# Altium PCB PCB1.PcbDoc
Units mil, origin at the board's own origin, x right, y up, seen from the top; angles counter-clockwise.
Board outline 3228.35 x 3228.35 mil, 2 copper layers (Top Layer, Bottom Layer); 62 components, 63 nets, 350 pads, 58 vias.
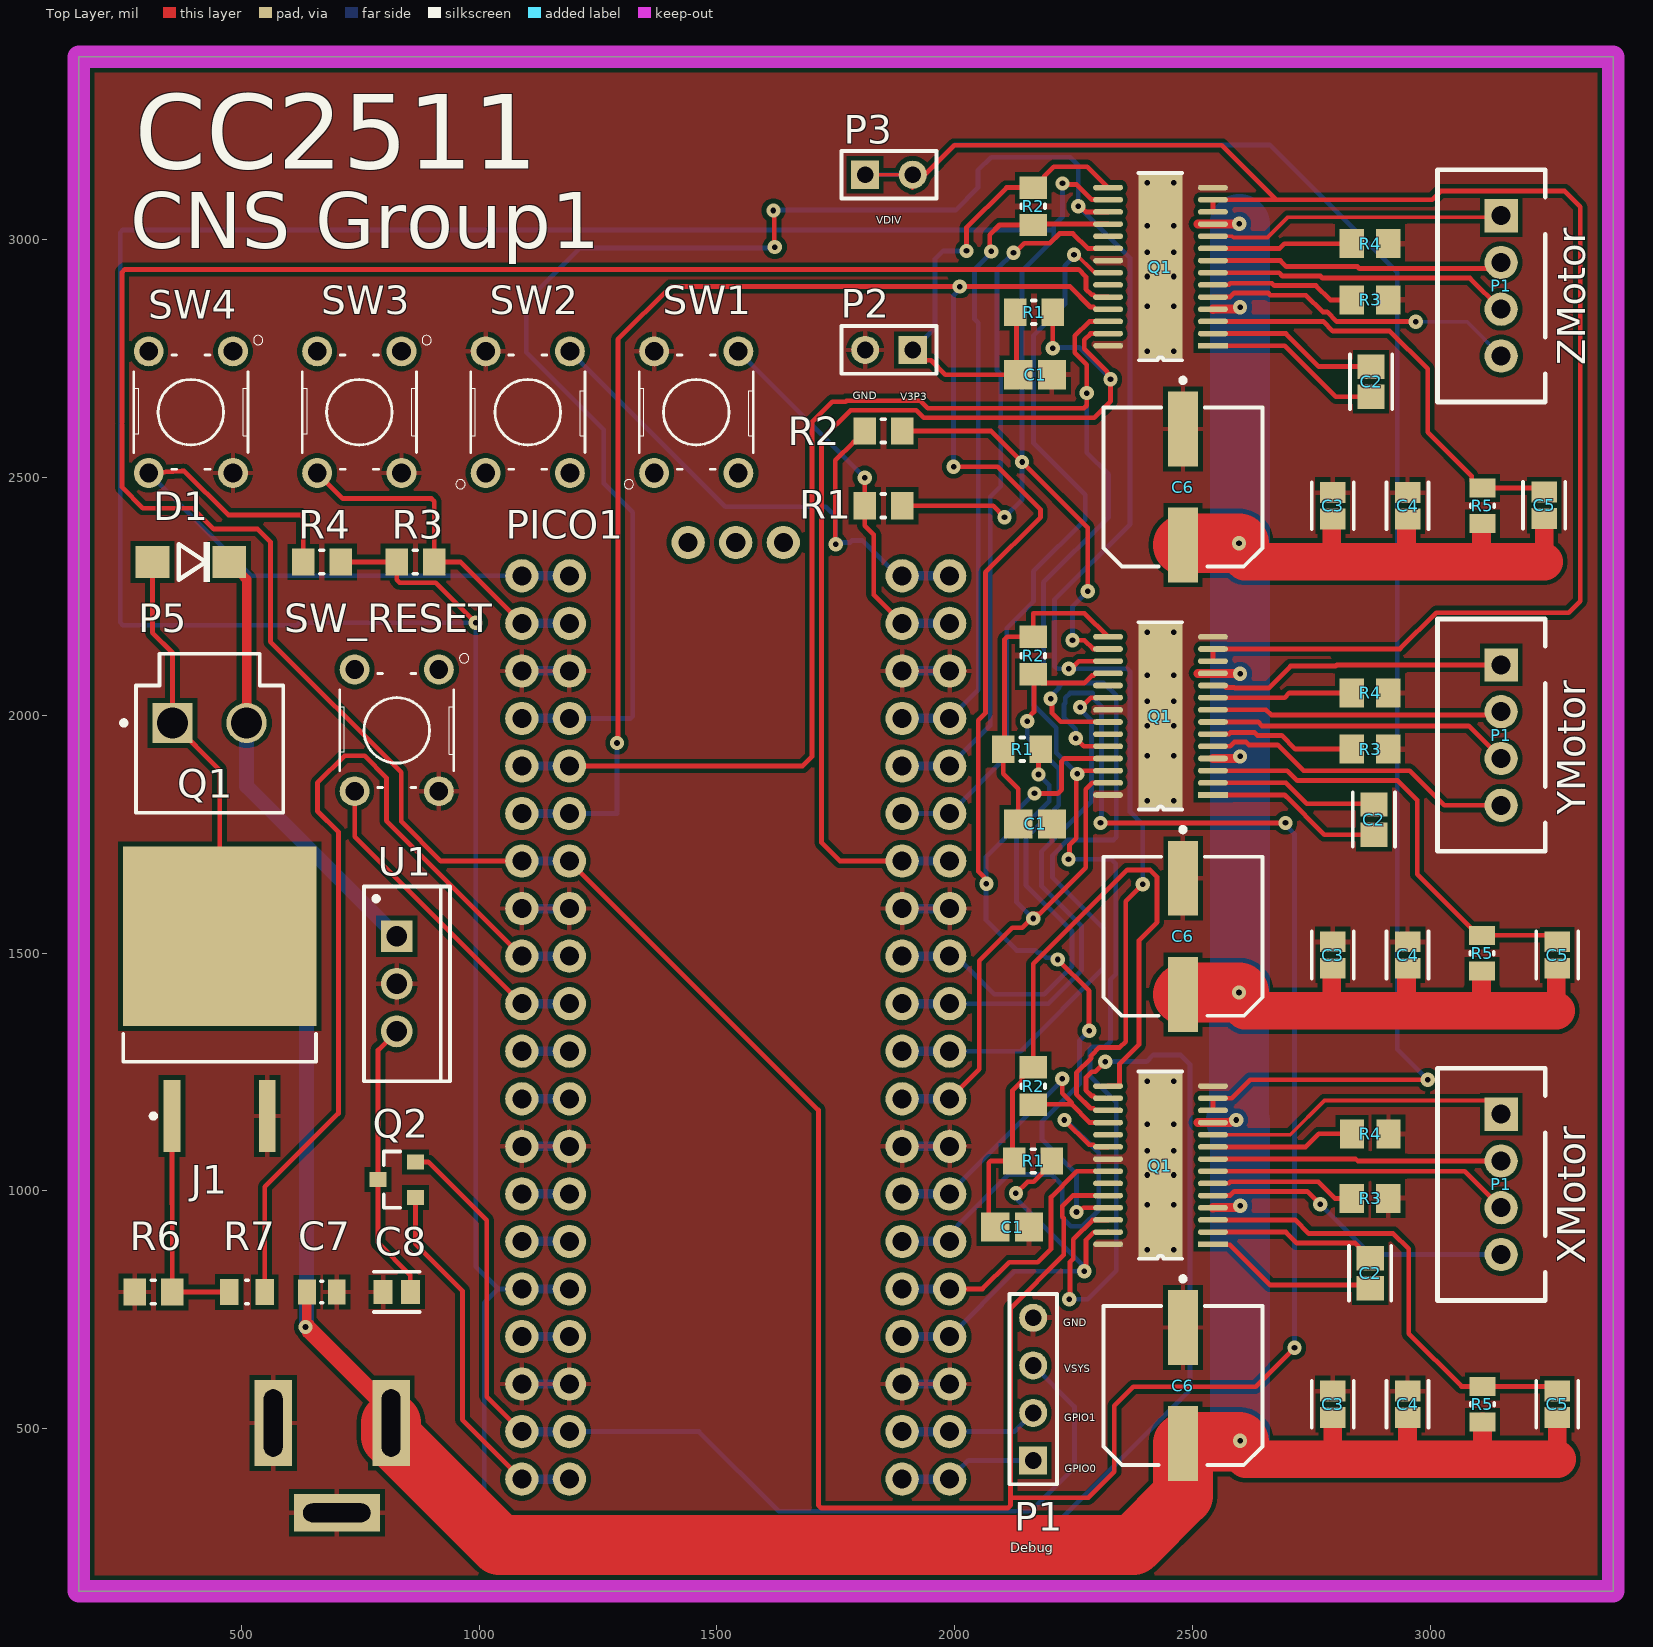
[diagram p0: Top Layer view]
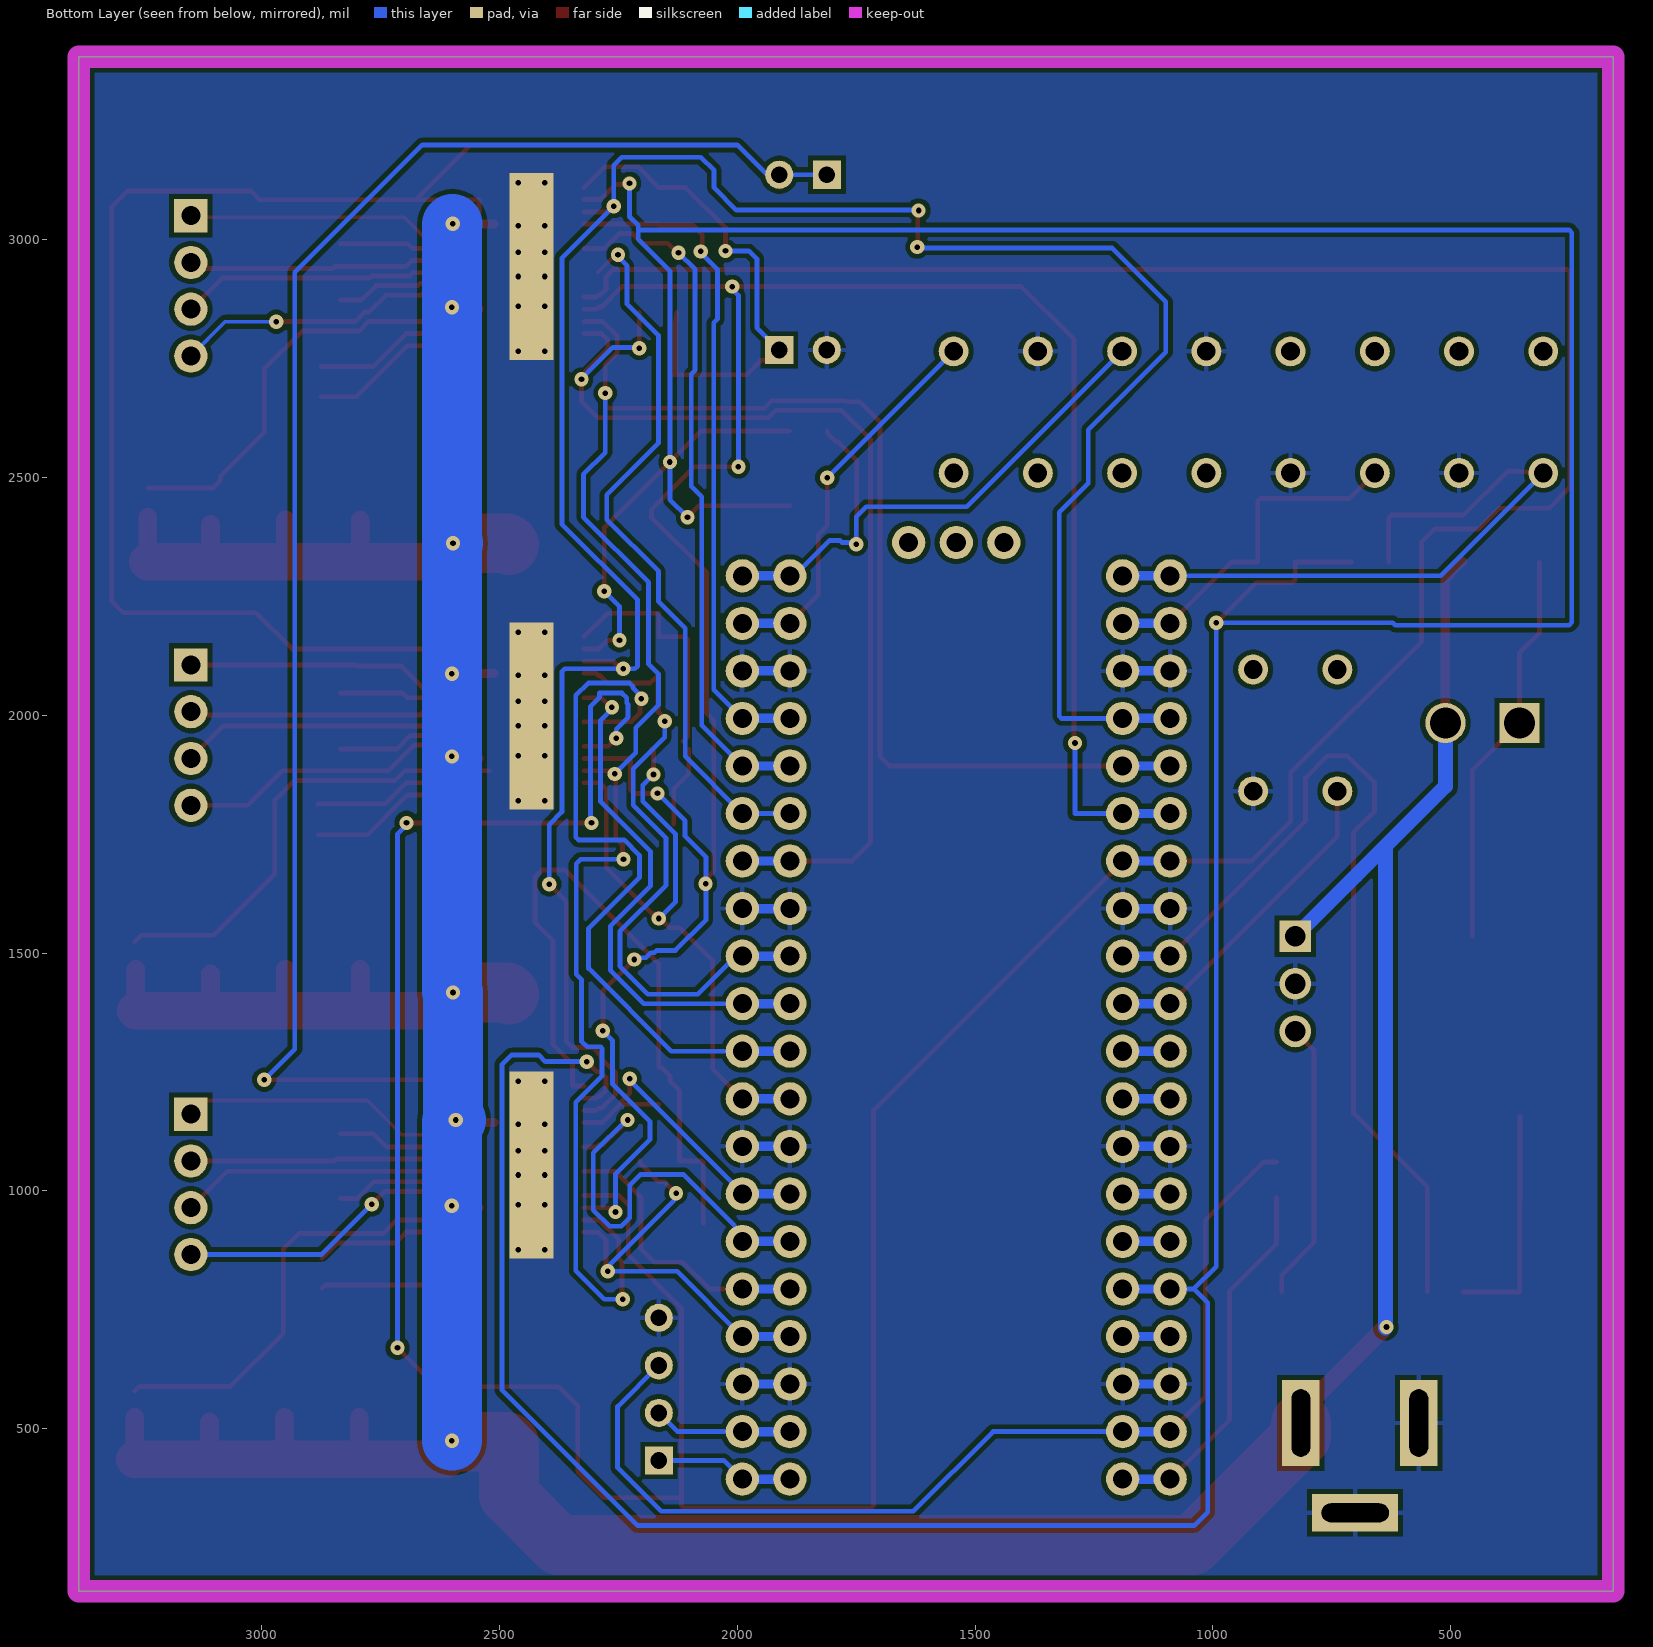
[diagram p1: Bottom Layer view, seen from below]

## Layer stack, top to bottom
Top Solder: solder mask 0.4, Solder Resist, Dk 3.5
Top Layer: signal copper 1.4
Dielectric 1: dielectric 12.6, FR-4, Dk 4.8
Bottom Layer: signal copper 1.4
Bottom Solder: solder mask 0.4, Solder Resist, Dk 3.5

## Board outline
157.48,3385.83 3385.83,3385.83 3385.83,157.48 157.48,157.48

## Design rules (kind name [scope] priority, off if disabled: settings)
Clearance [All] p1: gap=10 ignorepadtopadclearanceinfootprint=FALSE except(0: Arc-Hole Track-Hole SMDPad-Hole THPad-Hole Via-Hole Fill-Hole Poly-Hole Region-Hole Text-Hole)
HoleSize [All] p1: absolutevalues=TRUE maxlimit=150 minlimit=11.81 maxpercent=80.000 minpercent=20.000
MinimumSolderMaskSliver [All] p1: minsoldermaskwidth=1
PolygonConnect "DRV8825 Heatsinking" [HasFootprint('DRV8825 HTSSOP') vs InNet('GND')] p1: connectstyle=Direct reliefconductorwidth=10 reliefentries=4 polygonreliefangle="90 Angle" airgapwidth=10
PolygonConnect [All] p2: connectstyle=Relief reliefconductorwidth=10 reliefentries=4 polygonreliefangle="90 Angle" airgapwidth=10
RoutingVias [All] p1: holewidth=11.81 width=30 viastyle="Through Hole" minholewidth=11.81 minwidth=19.68 maxholewidth=11.81 maxwidth=50
SMDNeckDown [All] p1: percent=200.000
SilkToSilkClearance [All] p1: silktosilkclearance=1
SilkToSolderMaskClearance [IsPad] p1: minsilkscreentomaskgap=1 clearancetoexposedcopper=TRUE
SolderMaskExpansion [All] p1: expansion=4 istentingtop=FALSE
Width Width_1 [InNet('VM')] p1: maxlimit=157.48 minlimit=8 preferedwidth=157.48 minimp=50.000000 maximp=50.000000 favimp=50.000000
Width [All] p2: maxlimit=25 minlimit=8 preferedwidth=10 toplayer_maxwidth=10 minimp=50.000000 maximp=50.000000 favimp=50.000000
26 further rules are at their usual default settings.

## Classes and differential pairs
channel class "DRV8825 stepper motor controller": XStepper YStepper ZStepper
component class ZStepper: C2 C3 C4 C5 C6 R5
component class Spindle: D1 P5 Q1 R6 R7
component class Power: C7 C8 J1 U1
component class Main: P1 P2 P3 PICO1 Q2 R1 R2 R3 R4 SW1 SW2 SW3 SW4 SW_RESET

## Components (designator, comment, footprint, x,y, rotation, side; value= is the part's Value field where it differs from the comment)
C1 "0.47uF" CAPC2013X140X50ML20T25 2169.29,2716.53 r0 top
C1 "0.47uF" CAPC2013X140X50ML20T25 2169.29,1771.65 r0 top
C1 "0.47uF" CAPC2013X140X50ML20T25 2121,924 r0 top
C2 "0.01uF" FP-0805-L_2_01_0_2-W_1_25-IPC_B 2876,2702 r270 top
C2 "0.01uF" FP-0805-L_2_01_0_2-W_1_25-IPC_B 2882,1781 r270 top
C2 "0.01uF" FP-0805-L_2_01_0_2-W_1_25-IPC_B 2874.01,826.77 r270 top
C3 "0.1uF" FP-0805-L_2_01_0_2-W_1_25-IPC_C 2795.28,2440.94 r90 top
C3 "0.1uF" FP-0805-L_2_01_0_2-W_1_25-IPC_C 2795.28,1496.06 r90 top
C3 "0.1uF" FP-0805-L_2_01_0_2-W_1_25-IPC_C 2795.28,551.18 r90 top
C4 "0.1uF" FP-0805-L_2_01_0_2-W_1_25-IPC_C 2952.76,2440.94 r90 top
C4 "0.1uF" FP-0805-L_2_01_0_2-W_1_25-IPC_C 2952.76,1496.06 r90 top
C4 "0.1uF" FP-0805-L_2_01_0_2-W_1_25-IPC_C 2952.76,551.18 r90 top
C5 "0.1uF" FP-0805-L_2_01_0_2-W_1_25-IPC_C 3240,2442 r90 top
C5 "0.1uF" FP-0805-L_2_01_0_2-W_1_25-IPC_C 3267.72,1496.06 r90 top
C5 "0.1uF" FP-0805-L_2_01_0_2-W_1_25-IPC_C 3267.72,551.18 r90 top
C6 "100uF" FP-FKE-MFG 2480.32,2480.32 r270 top
C6 "100uF" FP-FKE-MFG 2480.31,1535.43 r270 top
C6 "100uF" FP-FKE-MFG 2480.31,590.55 r270 top
C7 "33uF" CAPC0805(2012)100_L 669.29,787.4 r180 top value=330nF
C8 "0.1uF" FP-0805B-IPC_C 826.77,787.4 r180 top
D1 "" SS34-1 393.7,2322.83 r180 top
J1 "Barrel Jack 5.5x2.1mm" "Barrel Jack 2.1x5.5mm THT" 275.59,511.81 r270 top
P1 "Header 4" HDR1X4 2165.35,433.07 r90 top
P1 "Header to stepper motor" "B4B-XH-A (LF)(SN)" 3149.6,3051.18 r270 top
P1 "Header to stepper motor" "B4B-XH-A (LF)(SN)" 3149.6,2106.3 r270 top
P1 "Header to stepper motor" "B4B-XH-A (LF)(SN)" 3149.6,1161.42 r270 top
P2 "Header 2" HDR1X2 1912.02,2768.83 r180 top
P3 "Header 2" HDR1X2 1812.03,3137.24 r0 top
P5 "2 Port Header" JST-B2P-VH(LF)(SN)_V 433.07,1929.13 r0 top
PICO1 "Raspberry Pi Pico R3" RASPI_PICO_83 1939.76,348.7 r90 top
Q1 "BUK9635-55A,118" NXP-SOT404_L 454.33,1401.58 r90 top
Q1 "DRV8825" "DRV8825 HTSSOP" 2543.31,2777.56 r180 top
Q1 "DRV8825" "DRV8825 HTSSOP" 2543.3,1832.67 r180 top
Q1 "DRV8825" "DRV8825 HTSSOP" 2543.31,887.79 r180 top
Q2 "DMG2307L-7" FP-SOT23-MFG 826.77,1023.62 r180 top
R1 "10k" RESC2013X60X35ML10T20 1850.39,2440.94 r180 top
R1 "10k" RESC2013X60X35ML10T20 2167,2848 r180 top
R1 "10k" RESC2013X60X35ML10T20 2142,1929 r180 top
R1 "10k" RESC2013X60X35ML10T20 2165.35,1062.99 r180 top
R2 "10k" RESC2013X60X35ML10T20 1850.4,2598.42 r180 top
R2 "10k" RESC2013X60X35ML10T20 2165.35,3070.87 r270 top
R2 "10k" RESC2013X60X35ML10T20 2165.35,2125.98 r270 top
R2 "10k" RESC2013X60X35ML10T20 2165.35,1220.47 r270 top
R3 "0.47" RESC2013X65X40ML15T20 2874.01,984.25 r0 top
R3 "10k" RESC2013X60X35ML10T20 866.14,2322.83 r0 top
R3 "0.47" RESC2013X65X40ML15T20 2874.01,2874.01 r0 top
R3 "0.47" RESC2013X65X40ML15T20 2874.01,1929.13 r0 top
R4 "10k" RESC2013X60X35ML10T20 669.29,2322.84 r180 top
R4 "0.47" RESC2013X65X40ML15T20 2874.01,2992.12 r0 top
R4 "0.47" RESC2013X65X40ML15T20 2874.01,2047.24 r0 top
R4 "0.47" RESC2013X65X40ML15T20 2874.37,1120 r0 top
R5 "1M" FP-CRCW0805-e3-IPC_B 3110.24,2440.94 r90 top
R5 "1M" FP-CRCW0805-e3-IPC_B 3109.37,1500 r90 top
R5 "1M" FP-CRCW0805-e3-IPC_B 3110.24,551.18 r90 top
R6 "10k" RESC2013X60X35ML10T20 314.96,787.4 r0 top
R7 "10" FP-CRCW0805-e3-IPC_B 511.81,787.4 r180 top
SW1 "B3F-1000" SW_B3F-1000 1456.69,2637.8 r90 top
SW2 "B3F-1000" SW_B3F-1000 1102.36,2637.8 r90 top
SW3 "B3F-1000" SW_B3F-1000 748.03,2637.8 r270 top
SW4 "B3F-1000" SW_B3F-1000 393.7,2637.8 r270 top
SW_RESET "B3F-1000" SW_B3F-1000 826.77,1968.5 r270 top
U1 "5V Regulator" TO220 826.77,1435.44 r270 top

## Footprints (in the part's own frame and the unit in brackets; to place one, negate y for a bottom-side part, rotate by r counter-clockwise, add the part's x,y. Pads: shape width x height; smd on the part's side, far side on the other; paste and mask are expansions set on the pad)
"B4B-XH-A (LF)(SN)" [mil] "B4B-XH-A (LF)(SN) Wire-To-Board Connector, Vertical, 2.5 mm, 4 Contacts"
  rect 70x70 hole 40: 1(0,0)
  round 70 hole 40: 2(98.42,0) 3(196.85,0) 4(295.28,0)
  silkscreen extent -96,-134 392,93, body extent -97,-134 391,92, height 276
"Barrel Jack 2.1x5.5mm THT" [mm] "GCT DCJ200-10-A-K1-K"
  rect 4.6x2 hole 1 slot 3.6 at 0 deg: 1(0,13.7) 2(0,7.4)
  rect 2x4.6 hole 1 slot 3.6 at 90 deg: 2(4.8,10.8)
  body extent -4.47,0 5.07,14.3, height 11
CAPC0805(2012)100_L [mm] "Chip Capacitor, Body 2.0x1.2mm, Height 1.0mm, IPC High Density"
  rect 0.95x1.35 smd: 1(-0.8,0) 2(0.8,0)
  silkscreen extent -0.05,-0.58 0.05,0.57, body extent -1.1,-0.72 1.1,0.72, height 1
CAPC2013X140X50ML20T25 [mm] "Chip Capacitor, 2-Leads, Body 2.00x1.25mm, IPC Low Density"
  rect 1.5x1.55 smd: 1(-0.9,0) 2(0.9,0)
  body extent -1.1,-0.72 1.1,0.72, height 1.4
"DRV8825 HTSSOP" [mm]
  rect 1.6x0.3 smd paste+0 mask+0.07: 1(0,0)
  oval 1.6x0.3 smd paste+0 mask+0.07: 2(0,-0.65) 3(0,-1.3) 4(0,-1.95) 5(0,-2.6) 6(0,-3.25) 7(0,-3.9) 8(0,-4.55) 9(0,-5.2) 10(0,-5.85) 11(0,-6.5) 12(0,-7.15) 13(0,-7.8) 14(0,-8.45) 15(5.6,-8.45) 16(5.6,-7.8) 17(5.6,-7.15) 18(5.6,-6.5) 19(5.6,-5.85) 20(5.6,-5.2) 21(5.6,-4.55) 22(5.6,-3.9) 23(5.6,-3.25) 24(5.6,-2.6) 25(5.6,-1.95) 26(5.6,-1.3) 27(5.6,-0.65) 28(5.6,0)
  round 0.6 hole 0.3: PPAD(2.1,0.3) PPAD(2.1,-3.7) PPAD(2.1,-2.1) PPAD(2.1,-6.4) PPAD(2.1,-5) PPAD(2.1,-8.7) PPAD(3.5,-2.1) PPAD(3.5,0.3) PPAD(3.5,-8.7) PPAD(3.5,-6.4) PPAD(3.5,-5) PPAD(3.5,-3.7)
  rect 2.34x10 smd paste-100 mask-100: PPAD(2.8,-4.225)
  rect 2.34x5.18 smd paste+0: PPAD(2.8,-4.225)
  rect 2.34x10 smd far side paste-100 mask-100: PPAD(2.8,-4.225)
  silkscreen extent 1.63,-9.23 3.97,0.77, body extent -0.65,-9.34 6.25,0.87, height 1.11
FP-0805-L_2_01_0_2-W_1_25-IPC_B [mil]
  rect 51.36x57.33 smd paste+0 mask+0: 1(-31.72,0) 2(31.72,0)
  silkscreen extent -57,-44 57,44, body extent -67,-39 67,39, height 10
FP-0805-L_2_01_0_2-W_1_25-IPC_C [mil]
  rect 43.49x53.39 smd paste+0 mask+0: 1(-27.79,0) 2(27.79,0)
  silkscreen extent -50,-44 50,44, body extent -53,-32 53,32, height 10
FP-0805B-IPC_C [mil]
  rect 39.61x49.69 smd paste+0 mask+0: 1(-28.59,0) 2(28.59,0)
  silkscreen extent -48,-42 48,42, body extent -52,-31 52,31, height 10
FP-CRCW0805-e3-IPC_B [mil]
  rect 39.63x55.44 smd paste+0 mask+0: 1(-37.43,0) 2(37.44,0)
  silkscreen extent -3,-25 3,25, body extent -67,-38 67,38, height 10
FP-FKE-MFG [mm]
  rect 4x1.6 smd paste+0 mask+0: 1(-3.1,0) 2(3.1,0)
  silkscreen extent -5.82,-4.25 4.25,4.25, body extent -5.35,-4.5 5.35,4.5, height 0.25
FP-SOT23-MFG [mm]
  rect 0.9x0.8 smd paste+0 mask+0: 1(-1,0.95) 2(-1,-0.95) 3(1,0)
  silkscreen extent -0.18,-1.5 0.7,1.5, body extent -1.55,-1.6 1.55,1.6, height 0.25
HDR1X2 [mm] "Connector; Header; 2 Position"
  rect 1.5x1.5 hole 0.9: 1(0,0)
  round 1.5 hole 0.9: 2(2.54,0)
  silkscreen extent -1.27,-1.27 3.81,1.27
HDR1X4 [mm] "Connector; Header; 4 Position"
  rect 1.5x1.5 hole 0.9: 1(0,0)
  round 1.5 hole 0.9: 2(2.54,0) 3(5.08,0) 4(7.62,0)
  silkscreen extent -1.27,-1.27 8.89,1.27
JST-B2P-VH(LF)(SN)_V [mm] "THD, 2-Leads, Body 8.5x7.86mm, Pitch 3.96mm"
  rect 2.15x2.15 hole 1.65: 1(-1.98,1.4)
  round 2.15 hole 1.65: 2(1.98,1.4)
  silkscreen extent -4.7,-3.4 3.93,5.1, body extent -3.93,-3.2 3.93,5.3, height 10.9
NXP-SOT404_L [mm] "DPAK, 3-Leads, Body 10.3x9.8mm, Pitch 2.54mm, IPC High Density"
  rect 3.85x0.9 smd: 1(-6.2,2.54) 3(-6.2,-2.54)
  rect 9.6x10.35 smd: 2(3.4,0)
  silkscreen extent -6.32,-5.15 -1.8,5.15, body extent -3.3,-5.15 6.5,5.15, height 4.5
RASPI_PICO_83 [mil] "Raspberry Pi Pico 40-pin +40 breakouts + 3 debug"
  round 70 hole 40: 1(45,-50) 1(45,50) 2(145,-50) 2(145,50) 3(245,-50) 3(245,50) 4(345,-50) 4(345,50) 5(445,-50) 5(445,50) 6(545,-50) 6(545,50) 7(645,-50) 7(645,50) 8(745,-50) 8(745,50) 9(845,-50) 9(845,50) 10(945,-50) 10(945,50) 11(1045,-50) 11(1045,50) 12(1145,-50) 12(1145,50) 13(1245,-50) 13(1245,50) 14(1345,-50) 14(1345,50) 15(1445,-50) 15(1445,50) 16(1545,-50) 16(1545,50) 17(1645,-50) 17(1645,50) 18(1745,-50) 18(1745,50) 19(1845,-50) 19(1845,50) 20(1945,-50) 20(1945,50) 21(1945,750) 21(1945,850) 22(1845,750) 22(1845,850) 23(1745,750) 23(1745,850) 24(1645,750) 24(1645,850) 25(1545,750) 25(1545,850) 26(1445,750) 26(1445,850) 27(1345,750) 27(1345,850) 28(1245,750) 28(1245,850) 29(1145,750) 29(1145,850) 30(1045,750) 30(1045,850) 31(945,750) 31(945,850) 32(845,750) 32(845,850) 33(745,750) 33(745,850) 34(645,750) 34(645,850) 35(545,750) 35(545,850) 36(445,750) 36(445,850) 37(345,750) 37(345,850) 38(245,750) 38(245,850) 39(145,750) 39(145,850) 40(45,850) 40(45,750) 41(2015,300) 42(2015,400) 43(2015,500)
  Bottom Layer lines w10: 1445,50 1445,36.96 1445,-50
  Bottom Layer lines w19.68: 45,850 45,760 ; 145,850 145,750 ; 245,850 245,750 ; 345,850 345,750 ; 445,850 445,822.06 445,750 ; 545,850 545,760 ; 645,850 645,760 ; 745,850 745,750 ; 845,850 845,750 ; 945,850 945,750 ; 1045,850 1045,750 ; 1145,850 1145,750 ; 1245,850 1245,750 ; 1345,850 1345,750 ; 1445,850 1445,833.75 1445,750 ; 1545,850 1545,826.33 1545,750 ; 1645,850 1645,750 ; 1745,850 1745,750 ; 1845,850 1845,750 ; 1945,850 1945,750 ; 45,50 45,-50 ; 145,50 145,-35 ; 245,50 245,-50 ; 345,50 345,-50 ; 445,50 445,-50 ; 545,50 545,-50 ; 645,50 645,-50 ; 845,50 845,-40 ; 945,50 945,36.96 945,-50 ; 1045,50 1045,-50 ; 1145,50 1145,22.06 1145,-50 ; 1245,50 1245,-50 ; 1345,50 1345,-50 ; 1545,50 1545,-50 ; 1645,50 1645,32.84 1645,-50 ; 1745,50 1745,-50 ; 1845,50 1845,-50 ; 1945,50 1945,-50 ; 745,40 745,-50
  body extent -64,-100 2065,900, height 720
RESC2013X60X35ML10T20 [mm] "Chip Resistor, 2-Leads, Body 2.1x1.35mm, IPC Low Density"
  rect 1.2x1.45 smd: 1(-1,0) 2(1,0)
  silkscreen extent -0.1,-0.63 0.1,0.62, body extent -1.05,-0.68 1.05,0.67, height 0.6
RESC2013X65X40ML15T20 [mm] "Chip Resistor, 2-Leads, Body 2.00x1.30mm, IPC Low Density"
  rect 1.3x1.55 smd: 1(-0.975,0) 2(0.975,0)
  body extent -1.07,-0.72 1.08,0.72, height 0.65
SS34-1 [mm]
  rect 1.8x1.7 smd: A(2.05,0) C(-2.05,0)
  silkscreen extent -1,-1.05 0.65,1.05
SW_B3F-1000 [mm]
  round 1.6 hole 1: 1(-3.25,2.25) 2(3.25,2.25) 3(-3.25,-2.25) 4(3.25,-2.25)
  silkscreen extent -4.1,-3.05 3.05,3.85
TO220 [mm] "TO, Thru-Hole, Vertical, Heatsink Mounted; 3 In-Line Leads; Pitch 2.54 mm"
  rect 1.7x1.7 hole 1.1: 1(-2.54,0)
  round 1.7 hole 1.1: 2(0,0) 3(2.54,0)
  silkscreen extent -5.2,-1.75 5.2,2.85, body extent -5.25,-1.8 5.25,2.9, height 19.7

## Part data
C1 C1 C1: library part CMP-2007-03309-1, Manufacturer=Kemet, Part Number=C0805F474K3RACTU
C2 C2 C2: library part CMP-2007-04361-2, "General Purpose Ceramic Capacitor, 0805, 10nF, 5%, X7R, 0.15, 50V", Capacitance=10nF, Case Code (Imperial)=0805, Case Code (Metric)=2012, Dielectric=X7R, Dielectric Material=Ceramic, Insulation Resistance=100GR, Max Operating Temperature=125°C, Min Operating Temperature=-55°C, Package Quantity=1, Tolerance=5%, Voltage=50V, Case/Package=0805, Construction=Flat, Contact Plating=Tin, Depth=1.25mm, Dissipation Factor=2.5%, Height=0.71mm, Lead Free="Lead Free", Length=2.01mm, Mount="Surface Mount", Number of Pins=2, Packaging="Tape and Reel", Radiation Hardening=No, REACH SVHC="No SVHC", RoHS Compliant=Yes, Series=-, Termination=SMD/SMT, Thickness=0.037inch, Voltage Rating=50V, Voltage Rating (DC)=50V, Width=0.049inch
C3 C3 C3 C4 C4 C4 C5 C5 C5: library part CMP-2000-05016-2, "General Purpose Ceramic Capacitor, 0805, 100nF, 10%, X7R, 0.15, 50V", Capacitance=100nF, Case Code (Imperial)=0805, Case Code (Metric)=2012, Dielectric=X7R, Dielectric Material=Ceramic, Insulation Resistance=100GR, Max Operating Temperature=125°C, Min Operating Temperature=-55°C, Package Quantity=4000, Tolerance=10%, Voltage=50V, Case/Package=0805, Depth=1.25mm, Dissipation Factor=2.5%, Height=0.5mm, Lead Free="Lead Free", Length=2mm, Mount="Surface Mount", Number of Pins=2, Packaging="Cut Tape", Radiation Hardening=No, REACH SVHC="No SVHC", RoHS Compliant=Yes, Series="MLCC X7R", Termination=Standard, Thickness=0.037inch, Voltage Rating=50V, Voltage Rating (DC)=50V, Weight=0.001411oz, Width=1.2mm
C6 C6 C6: library part CMP-2000-06205-2, "CAP ALUM 100UF 20% 25V SMD", Case/Package=Radial, Dielectric Material=Aluminium, ESR (Equivalent Series Resistance)=260mR, Leakage Current=3uA, Max Operating Temperature=105°C, Min Operating Temperature=-55°C, Package Quantity=1, Ripple Current=300mA, Tolerance=20%, Voltage=25V, Capacitance=100uF, Construction=Cylindrical, Diameter=8mm, Height=6.2mm, Height - Seated (Max)=0.244inch, Impedance=260mR, Lead Free="Lead Free", Length=6.2mm, Life (Hours)=2000Hour, Mount="Surface Mount", Number of Pins=2, Packaging="Tape and Reel", Radiation Hardening=No, REACH SVHC="No SVHC", Ripple Current (AC)=300mA, RoHS Compliant=Yes, Series=FK, Termination=SMD/SMT, Voltage Rating=25V, Voltage Rating (DC)=25V, Width=8.3mm
C7: library part CMP-1036-04603-1, "CAP 330nF 25V -20% to +80% 0805 (2012 Metric) Thickness 1mm SMD", Case-EIA=0805, Case-Metric=2012, Rated Voltage="25 V", Tolerance="-20% to +80%", Max Thickness="1 mm", Technology=SMT
C8: library part CMP-45632-000003-1, "CAP CER 0.1UF 50V X7R 0805", Capacitance=100nF, Case Code (Imperial)=0805, Case Code (Metric)=2012, Dielectric=X7R, Max Operating Temperature=125°C, Min Operating Temperature=-55°C, Tolerance=10%, Voltage=50V, Case/Package=0805, Depth=1.25mm, Lead Free="Lead Free", Length=2mm, Packaging="Tape and Reel", Radiation Hardening=No, RoHS Compliant=Yes, Voltage Rating=50V, Voltage Rating (DC)=50V
D1: library part SS34-A, "34 Position Cable Assembly Rectangular Socket to Cable 3.00' (914.40mm)", Package="DO-214 Multicomp", Availability=Unavailable, Check_prices=https://www.snapeda.com/parts/SS34A/TE%20Connectivity%20AMP%20Connectors/view-part/585916/?ref=eda, MF="TE Connectivity", MP=SS34A, Price=None, SnapEDA_Link=https://www.snapeda.com/parts/SS34A/TE%20Connectivity%20AMP%20Connectors/view-part/585916/?ref=snap
J1: library part CMP-005-0005-1, "GCT DCJ200-10-A-K1-K", Component Type=Standard, Design Item ID="Barrel Jack 5.5x2.1mm", Pins=2, Source=JCULibrary.SchLib
P1: "Header, 4-Pin", LatestRevisionDate=17-Jul-2002, LatestRevisionNote="Re-released for DXP Platform.", Publisher="Altium Limited"
P1 P1 P1: library part "B4B-XH-A (LF)(SN) Wire-to-board connector", "Wire-to-board connector, vertical, 2.5mm, 4 contacts"
P2 P3: "Header, 2-Pin", LatestRevisionDate=17-Jul-2002, LatestRevisionNote="Re-released for DXP Platform.", Publisher="Altium Limited"
P5: library part JST_B2P-VH(LF)(SN), "Male Header, Pitch 3.96 mm, 1 x 2 Position, Height 10.9 mm, Tail Length 3.7 mm, -25 to 85 degC, RoHS, Bulk", Capacitance="27 pF", Case Code (Imperial)=0603, Case Code (Metric)=1608, Max Operating Temperature=125degC, Min Operating Temperature=-55degC, Package Quantity=4000, Resistance="100000000000 Ohm", Tolerance=5%, Type (Capacitors)=C0G, Voltage Rating="50 V", Case/Package=0603, ComponentLink1Description="Manufacturer URL", ComponentLink1URL=http://www.jst.com/home2.html, ComponentLink2Description=Datasheet, ComponentLink2URL=http://www.jst-mfg.com/product/pdf/eng/eVH.pdf, DatasheetVersion=May-16, Height="0.8 mm", Length="1.6 mm", Mount="Surface Mount", PackageDescription="Male Header, Pitch 3.96 mm, 1 x 2 Position, Height 10.9 mm, Tail Length 3.7 mm", PackageReference=B2P-VH(LF)(SN), Packaging="Tape and Reel", Pins=2, Radiation Hardening=No, REACH SVHC="No SVHC", RoHSCompliant=True, Voltage Rating (DC)="50 V", Width="0.8 mm"
PICO1: library part "Rapberry Pi Pico-R3"
Q1: "3G PENTABAND 824-2170MHZ STRAIGH", Manufacturer=Nexperia, Manufacturer Part Number="N-Type MOSFET", Supplier Part Number 1=1727-7196-1-ND, Category=MOSFETs, Pricing 1="1=1.16000, 10=1.03500, 100=0.80710 (USD)", RoHS=Yes, RoHS Compliant=Yes, Stock 1=28, Supplier 1=Digi-Key
Q1 Q1 Q1: library part "Stepper motor driver DRV8825", "TI DRV8825 Stepper Motor Controller IC"
Q2: library part CMP-12801-000080-1, "MOSFET P-CH 30V 2.5A SOT-23", Case/Package=SOT-23, Continuous Drain Current (ID)=3.8A, Drain to Source Resistance=90mR, Drain to Source Voltage (Vdss)=30V, Gate to Source Voltage (Vgs)=20V, Input Capacitance=371.3pF, Max Operating Temperature=150°C, Max Power Dissipation=760mW, Min Operating Temperature=-55°C, Package Quantity=3000, Power Dissipation=1.36W, Element Configuration=Single, Fall Time=13.4ns, Height=1mm, Lead Free="Lead Free", Length=3mm, Mount="Surface Mount", Number of Channels=1, Number of Elements=1, Number of Pins=3, Packaging="Tape and Reel", Radiation Hardening=No, Rds On Max=90mR, REACH SVHC="No SVHC", Rise Time=7.3ns, Turn-Off Delay Time=22.4ns, Turn-On Delay Time=4.8ns, Weight=0.000282oz, Width=1.4mm
R1 R1 R1 R1 R2 R2 R2 R2 R3 R4 R6: library part CMP-2000-05025-1, "Chip Resistor, 10 KOhm, +/- 5%, 0.125 W, -55 to 155 degC, 0805 (2012 Metric), RoHS, Tape and Reel", Manufacturer=Yageo, Package Description="2-Pin Surface Mounted Device, Body 2 x 1.25 mm", Package Reference=805, Power Rating=250mW, Resistance=10kohm, Resistance Tolerance=±5%, Resistor Case Style=0805[2012Metric], Resistor Element Type=ThickFilm, Temperature Coefficient=±100ppm/degC, Voltage Rating=150V, Automotive Qualification Standard=-, Datasheet URL=http://www.yageo.ru/pdf/RC0805.pdf, Datasheet Version="REV. 2, 09/2004", Manufacturer URL=http://www.yageo.com/, MSL=MSL1-Unlimited, Packaging=CutTape, Product Range=RCSeries, SVHC=ToBeAdvised
R3 R3 R3 R4 R4 R4: library part CMP-2001-04359-1, Manufacturer="Vishay Dale", Part Number=RCWE0805R470FKEA
R5 R5 R5: library part CMP-2001-03630-2, "RES Thick Film, 1MΩ, 1%, 0.125W, 100ppm/°C, 0805", Case Code (Imperial)=0805, Case Code (Metric)=2012, Max Operating Temperature=155°C, Min Operating Temperature=-55°C, Package Quantity=5000, Power Rating=125mW, Resistance=1MR, Temperature Coefficient=100ppm/°C, Tolerance=1%, Voltage Rating=150V, Case/Package=0805, Composition="Thick Film", Contact Plating=Tin, Depth=1.25mm, Height=0.45mm, Lead Free="Lead Free", Length=2mm, Military Standard=Not, Mount="Surface Mount", Number of Pins=2, Packaging="Tape and Reel", Radiation Hardening=No, Termination=SMD/SMT, Voltage Rating (DC)=150V, Weight=0.000194oz, Width=1.25mm
R7: library part CMP-2001-04190-2, "RES Thick Film, 10Ω, 1%, 0.125W, 100ppm/°C, 0805", Case Code (Imperial)=0805, Case Code (Metric)=2012, Max Operating Temperature=155°C, Max Power Dissipation=125mW, Min Operating Temperature=-55°C, Package Quantity=10000, Resistance=10R, Resistance Tolerance=1%, Resistor Type="Thick Film", Temperature Coefficient=100ppm/°C, Voltage Rating=150V, Case/Package=0805, Contact Plating=Tin, Features="Automotive AEC-Q200", Height=0.02inch, Lead Free="Lead Free", Length=0.079inch, Number of Pins=2, Number of Terminations=2, Packaging="Tape and Reel", Power Rating=125mW, Radiation Hardening=No, RoHS Compliant=Yes, Series=CRCW, Size Code=0805, Termination=SMD/SMT, Tolerance=1%, Voltage Rating (DC)=150V, Weight=0.000194oz, Width=0.049inch
SW1 SW2 SW3 SW4 SW_RESET: "Switch Tactile N.O. SPST Flat Round Button PC Pins 0.05A 24VDC 1000000Cycles 0.98N Thru-Hole Bag", Actuator Color=Grey, Contact Current Rating=50mA, Contact Resistance=100mR, Insulation Resistance=100MR, Manufacturer=Omron, Max Operating Temperature=70°C, Max Voltage Rating (DC)=24V, Min Operating Temperature=-25°C, Operating Force=0.98N, Package=None, Package Quantity=1500, Actuator Length=0.9mm, Actuator Type=Standard, Availability=Unavailable, Category="Tactile Switches", ComponentLink1Description=https://datasheet.ciiva.com/19453/162886-19453387.pdf?src-supplier=Jameco, ComponentLink1URL=https://datasheet.ciiva.com/19453/162886-19453387.pdf?src-supplier=Jameco, ComponentLink2Description=https://datasheet.ciiva.com/26883/getdatasheetpartid-388862-26883373.pdf?src-supplier=Verical, ComponentLink2URL=https://datasheet.ciiva.com/26883/getdatasheetpartid-388862-26883373.pdf?src-supplier=Verical, ComponentLink3Description=https://datasheet.ciiva.com/1701/en-b3f-1701027.pdf?src-supplier=Newark, ComponentLink3URL=https://datasheet.ciiva.com/1701/en-b3f-1701027.pdf?src-supplier=Newark, ComponentLink4Description=https://datasheet.ciiva.com/1532/en-b3f-1532548.pdf?src-supplier=Element14, ComponentLink4URL=https://datasheet.ciiva.com/1532/en-b3f-1532548.pdf?src-supplier=Element14, ComponentLink5Description=https://datasheet.ciiva.com/2899/b3f-0811-2899719.pdf?src-supplier=Digi-Key, ComponentLink5URL=https://datasheet.ciiva.com/2899/b3f-0811-2899719.pdf?src-supplier=Digi-Key, ComponentLink6Description=https://datasheet.ciiva.com/14142/b3f-eng-datasheet-14142455.pdf?src-supplier=Distrelec, ComponentLink6URL=https://datasheet.ciiva.com/14142/b3f-eng-datasheet-14142455.pdf?src-supplier=Distrelec, ComponentLink7Description=https://datasheet.ciiva.com/16154/en-b3f-16154887.pdf?src-supplier=Onlinecomponents.com, ComponentLink7URL=https://datasheet.ciiva.com/16154/en-b3f-16154887.pdf?src-supplier=Onlinecomponents.com, ComponentLink8Description=https://datasheet.ciiva.com/5283/b3f-0811-26083-5283547.pdf?src-supplier=Mouser, ComponentLink8URL=https://datasheet.ciiva.com/5283/b3f-0811-26083-5283547.pdf?src-supplier=Mouser, ComponentLink9Description=https://datasheet.ciiva.com/14539/70175266-14539084.pdf?src-supplier=Allied+Electronics, ComponentLink9URL=https://datasheet.ciiva.com/14539/70175266-14539084.pdf?src-supplier=Allied+Electronics, ComponentLink10Description=https://datasheet.ciiva.com/20148/78-0136-20148399.pdf?src-supplier=Rapid+Electronics, ComponentLink10URL=https://datasheet.ciiva.com/20148/78-0136-20148399.pdf?src-supplier=Rapid+Electronics, Contact Material=Gold,Silver, Contact Plating=Gold, Current Rating=50mA, Depth=6mm, Electrical Life=1000000Cycles, Height=3.4mm, Illumination Type=Non-Illuminated,Illuminated, Lead Free="Lead Free", Length=6mm, Manufacturer Part Number=B3F-1000, Max Current Rating=50mA, Mechanical Life=1000000Cycles, MF=Omron, Mount="Through Hole", MP=B3F-1000, Number of Pins=4, Number of Poles=1, Orientation=Straight, Packaging=Bag, Price=None, Pricing 1="1=0.29000, 10=0.28400, 25=0.26960, 100=0.24430, 250=0.22268, 500=0.20700, 1000=0.17658, 2500=0.17168 (USD)", Pricing 2="10=0.35900, 25=0.34000, 50=0.32400, 100=0.30800, 250=0.28000 (USD)", REACH SVHC=Unknown, RoHS=Yes, RoHS Compliant=Yes, Series=B3F, SnapEDA_Link=https://www.snapeda.com/parts/B3F-1000/Omron%20Electronics%20Inc-EMC%20Div/view-part/48569/?ref=snap, Stock 1=24669, Stock 2=14988, Supplier 1=Digi-Key, Supplier 2=Newark, Switch Function=Off-Mom, Switch Travel=0.25mm, Termination="PC Pins", Throw Configuration=SPST, Voltage Rating (DC)=24V, Weight=0.008818oz, Width=6mm
U1: library part CMP-0244-00483-1, "Positive Voltage Regulator, 5V, 3-Pin TO-220", ComponentLink1Description="Manufacturer URL", ComponentLink1URL=http://www.st.com, ComponentLink2Description=Datasheet, ComponentLink2URL=http://www.st.com/internet/com/TECHNICAL_RESOURCES/TECHNICAL_LITERATURE/DATASHEET/CD00000444.pdf, ComponentLink3Description="Package Specification", ComponentLink3URL=http://www.st.com/internet/com/TECHNICAL_RESOURCES/TECHNICAL_LITERATURE/PACKAGE_INFORMATION/CD00004649.pdf, DatasheetVersion=16/11/2011, PackageDescription="TO, Thru-Hole, Vertical, Heatsink Mounted; 3 In-Line Leads; Pitch 2.54 mm", PackageReference=TO220, PackageVersion=ver3.0

## Via types
v1: diameter 30, hole 11.81, Top Layer to Bottom Layer, 46 vias
v2: diameter 30, hole 12, Top Layer to Bottom Layer, 12 vias

## Nets (pads, with @x,y where several pads share a name; then routed paths per layer and width w, separated by ;. In a path a pad name is that pad's centre, name@x,y a point inside that pad or via, vN(x,y) a via of type N, cw(c..) or ccw(c..) an arc to the next point about the centre after c; other vN are vias at no path point)
3V3: PICO1.36 Q1.16 R1.1@1889.76,2440.95 R2.1@1889.76,2598.43 R3.1@826.77,2322.83 R4.1@708.66,2322.83 | length 10369.8
  Top Layer w10: R4.1@708.66,2322.83 826.77,2322.83 826.77,2285.15 832.63,2279.29 908.71,2279.29 v1(993,2195) ; R1.1@1889.76,2440.95 2081.05,2440.95 v1(2105,2417) ; R2.1@1889.76,2598.43 2076.57,2598.43 v1(2142,2533) 2280,2395 v1(2280,2261) ; v1(2227,3119) 2229.57,3116.43 2257,3116.43 2288.43,3084.99 2322.49,3084.99 Q1.16@2322.83,3084.65 ; v1(2248,2158) 2273.1,2158 2291.34,2139.76 Q1.16@2322.83,2139.76 ; v1(2317.08,1271.77) 2316.81,1271.77 2295.73,1250.69 2288.66,1250.69 2276.34,1238.37 2276.34,1211.81 2288.58,1199.57 2292.07,1199.57 2296.75,1194.88 Q1.16@2322.83,1194.88
  Bottom Layer w10: PICO1.36@1089.76,793.7 1040,793.7 ; v1(2105,2417) 2142,2454 2142,2934.76 2208.51,3001.28 2208.51,3021 ; v1(2227,3119) 2227,3049.2 2208.51,3030.71 2208.51,3021 ; v1(2248,2158) 2248,2229 v1(2280,2261) ; v1(2317.08,1271.77) 2317.31,1272 2403.71,1272 2417.71,1286 2475,1286 2495,1266 2495,581 2210,296 1039,296 1011,324 1011,764.7 1040,793.7 ; 1040,793.7 993,840.7 v1(993,2195) 621.8,2195 616.65,2189.85 250.86,2189.85 245,2195.71 245,3015.14 250.86,3021 2208.51,3021
+5: C8.1 Q2.3 U1.3 | length 592.5
  Top Layer w10: U1.3 787.4,1296.06 Q2.3 787.4,891 855.36,823.04 C8.1
GND: C1.2 C3.2 C4.2 C6.1 C7.1 C8.2 J1.2 P1.4@2165.35,733.07 P2.2 PICO1.3 PICO1.8 PICO1.13 PICO1.18 PICO1.23 PICO1.28 PICO1.33 PICO1.38 Q1.3@554.33,1157.48 Q1.14 Q1.21 Q1.28 Q1.PPAD R3.2@2912.4,984.25 R3.2@2912.4,1929.13 R3.2@2912.4,2874.02 R4.2@2912.4,2047.24 R4.2@2912.4,2992.12 R4.2@2912.76,1120 R6.1 SW1.2 SW2.2 SW3.2 SW4.2 SW_RESET.2 U1.2
GPIO0: P1.1@2165.35,433.07 PICO1.1 | length 191.9
  Bottom Layer w10: PICO1.1@1989.76,393.7 2029.13,433.07 P1.1@2165.35,433.07
GPIO1: P1.2@2165.35,533.07 PICO1.2 | length 206.9
  Bottom Layer w10: PICO1.2@1974.76,493.7 1989.76,493.7 2125.98,493.7 P1.2@2165.35,533.07
Mode0: PICO1.27 Q1.24 | length 9500.5
  Top Layer w10: 249.14,2611.62 249.14,2479.86 293,2436 398,2436 442,2392 534,2392 561,2365 561,2155 836,1880 836,1777 919.3,1693.7 PICO1.27@1089.76,1693.7 ; 249.14,2615.76 249.14,2932.14 255,2938 595.52,2938 2260.91,2938 2276.34,2922.58 2276.34,2896.85 2288.58,2884.61 2292.07,2884.61 2296.75,2879.92 Q1.24@2322.83,2879.92 ; PICO1.27@1189.76,1693.7 1710.64,1172.83 1713.56,1169.9 1713.56,338.86 1719.42,333 2107,333 ccw(c2107.73,342.97) 2107.8,332.97 2111.88,333 2114.77,335.87 ccw(c2107.73,342.97) 2114.85,335.95 2117.73,338.86 2117.73,753.59 2229.4,865.25 2229.4,942.73 2226.53,945.59 2226.53,967.95 2248.73,990.16 Q1.24@2322.83,990.16 ; 2117.73,354.54 2281.46,354.54 2336,409.08 2336,548 2376,588 2633,588 v1(2715,670) ; v1(2255,1952) 2271.96,1935.04 Q1.24@2322.83,1935.04 ; v1(2307,1774) v1(2696,1774)
  Bottom Layer w10: v1(2255,1952) 2255,1971 2230,1996 2230,2023 2233,2026 2233,2037 2243,2047 2290,2047 2290,2038 2309,2019 2309,1865 v1@2309,1773 ; v1(2696,1774) 2696,1769.57 2715,1750.57 v1(2715,670)
Mode1: PICO1.26 Q1.25 | length 5052.8
  Top Layer w10: v1@1292,1941 1292,2791 1403,2902 2242.91,2902 2285.89,2859.01 2292.07,2859.01 2296.75,2854.33 Q1.25@2322.83,2854.33 ; v1(1997.99,2522.99) 2091.01,2522.99 2181,2433 2181,2417 2065,2301 2065,2005 2050,1990 2050,1672 v1@2067,1655 ; v1@2064.7,1643.7 v1(2067,1646) ; v1(2168,1836) 2168.27,1835.73 2217.15,1835.73 2225,1843.57 2225,1903.59 2230.86,1909.45 Q1.25@2322.83,1909.45 ; v1(2217,1486.57) 2217.43,1486.57 2283,1421 v1(2283,1337) ; v1(2256.53,955.53) 2261.94,955.53 2270.98,964.57 Q1.25@2322.83,964.57
  Bottom Layer w10: PICO1.26@1189.76,1793.7 1290,1793.7 ; 1290,1798.23 v1(1290,1942) ; v1(1997.99,2522.99) 1997.99,2883.58 2011,2896.59 v1(2011,2902) ; v1(2168,1836) 2110.14,1778.14 2110.14,1746.14 2066,1702 2066,1647 v1(2067,1646) 2066,1645 2066,1570 2130.3,1505.7 2169.65,1505.7 2174.65,1500.7 2182.21,1500.7 2192.51,1490.4 2213.17,1490.4 v1(2217,1486.57) ; v1(2256.53,955.53) 2256.53,1035.47 2184,1108 2184,1146 2263,1225 2263,1317 v1(2283,1337)
Mode2: PICO1.25 Q1.26 | length 4614.1
  Top Layer w10: PICO1.25@1189.76,1893.7 1680.7,1893.7 1700,1913 1700,2617 1743,2660 1770.94,2660 1772.9,2661.97 1927.88,2661.97 1943.85,2646 2272.14,2646 2278,2651.86 2278,2737.72 2253,2762.72 2253,2798.28 2283.11,2828.39 2322.49,2828.39 Q1.26@2322.83,2828.74 ; v1@2239.71,1696.78 v1(2239.71,1697.29) ; v1(2241,772) 2243,774 2243,850.57 2249.4,856.97 2249.4,897.8 2290.23,938.63 2322.49,938.63 Q1.26@2322.83,938.98 ; v1@2243.71,1693.71 2241.61,1695.82 2241.61,1727.29 2256,1741.68 2256,1875.19 v1(2257.81,1877) ; v1@2258,1877 2263.22,1877 2270.07,1883.86 Q1.26@2322.83,1883.86
  Bottom Layer w10: v1(2239.71,1697.29) 2329.86,1697.29 2339,1688.14 2339,1456 2328,1445 2328,1315 2316,1303 2288,1303 2285,1300 2285,1241 2340,1186 2340,832 2280,772 v1(2241,772) ; v1(2257.81,1877) 2257.81,1877.19 2214,1921 2214,1974 2166,2022 2166,2087 2187,2108 2187,2280 2324,2417 2324,2507 2278,2553 v1(2278,2678)
NetC1_XStepper_1: C1.1@2085.57,924 Q1.15@2322.83,1220.47 R1.2@2125.98,1062.99 R2.1@2165.36,1259.84 | length 1459.2
  Top Layer w10: C1.1@2072,931 2072,1059 2075.99,1062.99 2121.81,1062.99 2121.81,1210.94 2141.81,1230.94 2141.81,1241.22 2160.43,1259.84 2165.36,1259.84 2165.36,1477.36 2363,1675 2411,1675 2426,1660 2426,1565 2388,1527 2388,1308 2346.64,1266.64 2346.64,1221.31 2345.8,1220.47 Q1.15@2322.83,1220.47
NetC1_YStepper_1: C1.1@2133.86,1771.65 Q1.15@2322.83,2165.35 R1.2@2102.63,1929 R2.1@2165.35,2165.35 | length 678.3
  Top Layer w10: R1.2@2102.63,1929 2102.63,1877.23 2133.86,1846 C1.1@2133.86,1771.65 ; R1.2@2114.38,1945.67 2104.86,1955.18 2104.86,2159.49 2110.72,2165.35 2165.35,2165.35 2165.35,2214.35 2166,2215 2273.19,2215 Q1.15@2322.83,2165.35
NetC2_XStepper_1: C2.1@2874.01,858.49 Q1.2@2543.31,913.39 | length 353.4
  Top Layer w10: Q1.2@2543.31,913.39 2697,913.39 2720.17,890.22 2842.29,890.22 C2.1@2874.01,858.49
NetC2_XStepper_2: C2.2@2874.01,795.05 Q1.1@2543.31,887.79 | length 369.1
  Top Layer w10: Q1.1@2543.31,887.79 2544.21,886.89 2579.11,886.89 2664,802 2867.06,802 C2.2@2874.01,795.05
NetC2_YStepper_1: C2.1@2882,1812.72 Q1.2@2543.31,1858.27 | length 357.6
  Top Layer w10: Q1.2@2543.31,1858.27 2697,1858.27 2740.85,1814.41 2880.31,1814.41 C2.1@2882,1812.72
NetC2_YStepper_2: C2.2@2882,1749.28 Q1.1@2543.31,1832.67 | length 373.3
  Top Layer w10: Q1.1@2543.31,1831.77 2569.8,1832.67 2694.31,1832.67 2697.24,1829.74 2777.71,1749.28 C2.2@2882,1749.28
NetC2_ZStepper_1: C2.1@2876,2733.72 Q1.2@2543.31,2803.15 | length 361.5
  Top Layer w10: Q1.2@2543.31,2803.15 2697,2803.15 2766.43,2733.72 C2.1@2876,2733.72
NetC2_ZStepper_2: C2.2@2876,2670.28 Q1.1@2543.31,2777.56 | length 377.1
  Top Layer w10: Q1.1@2543.31,2777.56 2694.31,2777.56 2732.56,2739.3 2801.59,2670.28 C2.2@2876,2670.28
NetD1_A: D1.A P5.1 Q1.2@454.33,1535.43 | length 845.9
  Top Layer w10: D1.A 312.99,2174.13 355.12,2132 P5.1 454.33,1885.04 Q1.2@454.33,1535.43
NetP1_3: P1.3@2165.35,633.07 PICO1.39 Q2.2 | length 2096.4
  Top Layer w10: Q2.2 892.98,1061.02 1016,938 1016,567.46 PICO1.39@1089.76,493.7
  Bottom Layer w10: PICO1.39@1189.76,493.7 1462.3,493.7 1630,326 2160,326 2252,418 2252,546.42 P1.3@2165.35,633.07
NetP1_XStepper_1: P1.1@3149.61,1161.42 Q1.10@2543.31,1118.11 | length 607.5
  Top Layer w8: Q1.10@2543.31,1118.11 2705.89,1118.11 2777.78,1190 P1.1@3121.02,1190
NetP1_XStepper_2: P1.2@3149.61,1062.99 Q1.8@2543.31,1066.93 | length 607.9
  Top Layer w10: Q1.8@2543.31,1066.93 2844,1066.93 2847.94,1062.99 P1.2@3149.61,1062.99
NetP1_XStepper_3: P1.3@3149.61,964.57 Q1.7@2543.31,1041.34 | length 638.1
  Top Layer w10: Q1.7@2543.31,1041.34 3072.84,1041.34 P1.3@3149.61,964.57
NetP1_XStepper_4: P1.4@3149.61,866.14 Q1.5@2543.31,990.16 | length 665
  Top Layer w10: Q1.5@2543.31,990.16 2543.65,990.5 2579.68,990.5 2588.16,998.98 2742.02,998.98 v1(2769,972)
  Bottom Layer w10: v1(2769,972) 2874.86,866.14 P1.4@3149.61,866.14
NetP1_YStepper_1: P1.1@3149.61,2106.3 Q1.10@2543.31,2062.99 | length 631.2
  Top Layer w10: Q1.10@2543.31,2062.99 2571,2062.99 2571,2059 2588.43,2059 2590,2057.43 2660.43,2057.43 2706.76,2103.76 2801.74,2103.76 2804.28,2106.3 P1.1@3149.61,2106.3
NetP1_YStepper_2: P1.2@3149.61,2007.87 Q1.8@2543.31,2011.81 | length 617.7
  Top Layer w10: Q1.8@2543.31,2011.81 2655,2011.81 2665.81,2001 3149.61,2001 P1.2@3149.61,2007.87
NetP1_YStepper_3: P1.3@3149.61,1909.45 Q1.7@2543.31,1986.22 | length 638.1
  Top Layer w10: Q1.7@2543.31,1986.22 2638.28,1986.22 2646.5,1978 3081.05,1978 P1.3@3149.61,1909.45
NetP1_YStepper_4: P1.4@3149.61,1811.02 Q1.5@2543.31,1935.04 | length 665
  Top Layer w10: Q1.5@2543.31,1935.04 2543.65,1935.38 2579.68,1935.38 2588.15,1943.86 2613.01,1943.86 2618.86,1938 2679.72,1938 2734.1,1883.62 2957.24,1883.62 3029.83,1811.02 P1.4@3149.61,1811.02
NetP1_ZStepper_1: P1.1@3149.61,3051.18 Q1.10@2543.31,3007.87 | length 617.2
  Top Layer w8: Q1.10@2543.31,3007.87 2584.11,3007.87 2586.99,3005 2658.25,3005 2701.25,3048 3137,3048 P1.1@3140.18,3051.18
NetP1_ZStepper_2: P1.2@3149.61,2952.76 Q1.8@2543.31,2956.69 | length 626
  Top Layer w10: Q1.8@2543.31,2956.69 2685.31,2956.69 2698,2944 2847.4,2944 2851.4,2940 3149.61,2940 P1.2@3149.61,2952.76
NetP1_ZStepper_3: P1.3@3149.61,2854.33 Q1.7@2543.31,2931.1 | length 638.1
  Top Layer w10: Q1.7@2543.31,2931.1 2682.61,2931.1 2689.72,2924 2769.55,2924 2773.55,2920 3083.94,2920 P1.3@3149.61,2854.33
NetP1_ZStepper_4: P1.4@3149.61,2755.91 Q1.5@2543.31,2879.92 | length 665
  Top Layer w10: Q1.5@2543.31,2879.92 2543.65,2880.27 2579.68,2880.27 2588.15,2888.74 2659.29,2888.74 2664.03,2884 2739,2884 2774.26,2848.74 2783.59,2848.74 2803.82,2828.5 2969.5,2828.5 v2(2970,2828)
  Bottom Layer w8: v2(2970,2828) 3077.51,2828 P1.4@3149.61,2755.91
NetPICO1_40: PICO1.40 Q2.1 | length 695.1
  Top Layer w10: Q2.1 866.14,888.86 965,790 965,518.46 PICO1.40@1089.76,393.7
  Bottom Layer w10: PICO1.40@1179.76,393.7 PICO1.40@1189.76,393.7
NetQ1_1: Q1.1@354.33,1157.48 R6.2 R7.2 | length 490.1
  Top Layer w10: Q1.1@354.33,1157.48 354.33,972 R6.2 414,787.4 R7.2
NetQ1_XStepper_6: Q1.6@2543.31,1015.75 R3.1@2835.63,984.25 | length 308
  Top Layer w10: Q1.6@2543.31,1015.75 2543.65,1016.09 2576.99,1016.09 2579.87,1018.98 2765.28,1018.98 2800,984.25 R3.1@2835.63,984.25
NetQ1_XStepper_9: Q1.9@2543.31,1092.52 R4.1@2835.98,1120 | length 304.1
  Top Layer w10: Q1.9@2543.31,1092.52 2738.52,1092.52 2766,1120 R4.1@2835.98,1120
NetQ1_YStepper_6: Q1.6@2543.31,1960.63 R3.1@2835.63,1929.13 | length 308
  Top Layer w10: Q1.6@2543.31,1960.63 2543.65,1960.97 2576.99,1960.97 2579.87,1963.86 2631.01,1963.86 2636.86,1958 2688,1958 2716.87,1929.13 R3.1@2835.63,1929.13
NetQ1_YStepper_9: Q1.9@2543.31,2037.4 R4.1@2835.63,2047.24 | length 296.4
  Top Layer w10: Q1.9@2543.31,2037.4 2694,2037.4 2703.84,2047.24 R4.1@2835.63,2047.24
NetQ1_ZStepper_6: Q1.6@2543.31,2905.51 R3.1@2835.63,2874.02 | length 308
  Top Layer w10: Q1.6@2543.31,2905.51 2543.65,2905.86 2576.99,2905.86 2579.87,2908.74 2667.57,2908.74 2672.31,2904 2760.02,2904 2790,2874.02 R3.1@2835.63,2874.02
NetQ1_ZStepper_9: Q1.9@2543.31,2982.28 R4.1@2835.63,2992.12 | length 296.4
  Top Layer w10: Q1.9@2543.31,2982.28 2684,2982.28 2693.84,2992.12 R4.1@2835.63,2992.12
RESET: PICO1.30 SW_RESET.4 | length 592.5
  Top Layer w10: SW_RESET.4 738.19,1745.28 PICO1.30@1089.76,1393.7
SLEEP: PICO1.24 Q1.17 | length 5012.8
  Top Layer w10: v1(1619,3062) 1620.5,3060.5 1620.5,2986.5 v1(1622,2985) ; v1(2240,2098) 2245.41,2098 2261.58,2114.17 Q1.17@2322.83,2114.17 ; v1(2260,3071) 2264.39,3071 2276.34,3059.05 Q1.17@2322.83,3059.05 ; Q1.17@2322.83,1169.29 2296.75,1169.29 2292.07,1173.98 2285.89,1173.98 2256.34,1203.53 2256.34,1248.04 2287.08,1278.78 2287.08,1284.19 2304.65,1301.77 2347.62,1301.77 2360,1314.14 2360,1609 v1(2396,1645)
  Bottom Layer w10: PICO1.24@1189.76,1993.7 1318.32,1993.7 1323,1998.38 1323,2427 1262,2488 1262,2601 1099,2764 1099,2870 1212,2983 1620,2983 v1(1622,2985) ; v1(1619,3062) 1620,3063 2002,3063 2049.25,3110.25 2049.25,3146.25 2077,3174 2243,3174 2260,3157 v1(2260,3071) 2369,2962 2369,2402 2210,2243 2210,2103.86 2215.86,2098 v1(2240,2098) 2363.14,2098 2369,2092.14 2369,1797 2396,1770 v1(2396,1645)
SpindlePWM: PICO1.29 R7.1 | length 1833.8
  Top Layer w10: R7.1 549.24,1008.24 704,1163 704,1700.62 704,1704.47 704,1755 660,1799 660,1843 660,1858 717,1915 759,1915 805,1869 805,1778.46 PICO1.29@1089.76,1493.7
SW1: PICO1.19 R1.2@1811.02,2440.95 SW1.4 | length 714.7
  Top Layer w10: v1(1811.02,2500) 1811.02,2399.4 1830,2380.43 1830,2253.46 PICO1.19@1889.76,2193.7
  Bottom Layer w10: SW1.4 v1(1811.02,2500)
SW2: PICO1.20 R2.2@1811.02,2598.43 SW2.4 | length 1202.4
  Top Layer w10: v1(1750,2360) 1749,2361 1749,2536.4 1787.48,2574.88 1792.4,2574.88 1811.02,2593.5 R2.2@1811.02,2598.43
  Bottom Layer w10: SW2.4 1517.69,2439 1729,2439 1750,2418 v1(1750,2360) 1753.59,2363.59 1780,2363.59 1784.41,2368 1805.41,2368 1871.59,2301.82 1881.64,2301.82 PICO1.20@1889.76,2293.7
SW3: PICO1.22 R3.2@905.51,2322.83 SW3.4 | length 635.8
  Top Layer w10: SW3.4 713.29,2456 899.65,2456 905.51,2450.14 905.51,2322.83 960.63,2322.83 PICO1.22@1089.76,2193.7
SW4: PICO1.21 R4.2@629.92,2322.83 SW4.4 | length 1332.7
  Top Layer w10: SW4.4 374.94,2513.99 375.53,2514.01 379.99,2514.01 472.39,2421.61 624.06,2421.61 629.92,2415.75 R4.2@629.92,2322.83
  Bottom Layer w10: SW4.4 521.26,2293.7 PICO1.21@1089.76,2293.7
V3P3OUT: C1.1@2133.86,2716.54 P2.1 Q1.15@2322.83,3110.24 R1.2@2127.63,2848 R2.1@2165.35,3110.24 | length 1078.2
  Top Layer w10: P2.1 1933.89,2746.96 1950.42,2746.96 1980.85,2716.54 2133.86,2716.54 2133.37,2717.03 2130.44,2719.96 2130.44,2824.46 R1.2@2127.63,2848 ; v1(2025,2977) 2025,3026 2109.24,3110.24 2165.35,3110.24 2209.12,3154 2279.07,3154 Q1.15@2322.83,3110.24
  Bottom Layer w10: P2.1 1959,2815.81 1959,2960 1976,2977 v1(2025,2977)
VCP_XStepper: C5.2@3267.72,578.97 Q1.3@2543.31,938.98 R5.2@3110.24,588.62 | length 977.8
  Top Layer w10: Q1.3@2543.31,938.98 2716.02,938.98 2744.78,910.22 2922.78,910.22 2955,878 2955,700 3066.38,588.62 3110.24,588.62 3258.07,588.62 C5.2@3267.72,578.97
VCP_YStepper: C5.2@3267.72,1523.85 Q1.3@2543.31,1883.86 R5.2@3109.37,1537.44 | length 987.3
  Top Layer w10: Q1.3@2520.95,1883.86 2699.69,1883.86 2720.55,1863 2932,1863 2973,1822 2973,1665.9 3101.46,1537.44 3254.13,1537.44 C5.2@3267.72,1523.85
VCP_ZStepper: C5.2@3240,2469.79 Q1.3@2543.31,2828.74 R5.2@3110.24,2478.38 | length 925.8
  Top Layer w10: Q1.3@2543.31,2828.74 2775.3,2828.74 2795.54,2808.5 2915.5,2808.5 2995,2729 2995,2595.86 3087.52,2503.34 3087.52,2493.19 3102.33,2478.38 C5.2@3240,2478.38
VDIV: P3.1 P3.2 Q1.12 Q1.13 | length 6905.2
  Top Layer w8: P3.1 P3.2
  Top Layer w10: P3.2@1911.02,3110.24 1925.02,3124.24 1999.79,3199 2562,3199 2676.35,3084.65 ; Q1.12@2543.31,1169.29 2543.31,1194.88 2583,1194.88 2622.12,1234 v1(2995,1234) ; Q1.12@2543.31,2114.17 2543.31,2139.76 2936.76,2139.76 3013,2216 3292,2216 3316,2240 3316,3070 3283,3103 3023,3103 3004.65,3084.65 2676.35,3084.65 ; Q1.12@2543.31,3059.05 2543.31,3084.65 2676.35,3084.65
  Bottom Layer w10: P3.1 P3.2 ; P3.2@1925.02,3124.24 2000.79,3200 2663,3200 2931,2932 2931,1298 v1(2995,1234)
VM: C3.1 C4.1 C5.1 C6.2 C7.2 D1.C J1.1 P5.2 Q1.4 Q1.11 R5.1 U1.1 | length 10884.2
  Top Layer w19: 2511.81,1143.7 2543.31,1143.7 2543.49,1143.89 2579.42,1143.89 2582.41,1146.88 2590.09,1146.88 v2(2592.2,1148.98) ; 2511.81,2088.58 v2@2599.43,2088.58 ; Q1.11@2511.81,3033.46 2543.31,3033.46 2543.49,3033.65 2598.65,3033.65 v2(2599,3034) ; Q1.4@2543.31,964.57 2543.49,964.75 2593.38,964.75 2597.61,968.98 v2(2600.58,968.98) ; Q1.4@2543.31,1909.45 2543.49,1909.63 2593.38,1909.63 2597.6,1913.86 v2(2600.58,1913.86) ; Q1.4@2543.31,2854.33 2543.49,2854.51 2593.38,2854.51 2597.6,2858.74 v2(2600.58,2858.74)
  Top Layer w20: D1.C 476.38,2322.83 499.84,2299.37 499.84,2297.4 511.02,2286.22 P5.2 ; C7.2 637.8,716.83 637.8,700.79 793.45,545.13 814.96,523.62 J1.1
  Top Layer w31.5: v2@637.8,716.83 645.82,708.81 J1.1@801.47,553.16
  Top Layer w39.37: 2793.12,1378.78 C3.1@2793.12,1466.12 ; 2793.12,2323.66 C3.1@2793.12,2411 ; 2795.28,436.06 C3.1@2795.28,523.39 ; 2950.6,1383.47 C4.1@2950.6,1466.12 ; 2950.6,2328.35 C4.1@2950.6,2411 ; 2952.76,440.74 C4.1@2952.76,523.39 ; 3108.08,1385.85 R5.1@3108.08,1456.47 ; 3108.08,2330.73 R5.1@3108.08,2401.35 ; 3110.24,443.13 R5.1@3110.24,513.74 ; 3240,2323.61 3240,2414.21 C5.1@3240,2416.27 ; 3265.56,1380.2 C5.1@3265.56,1466.12 ; 3267.72,437.47 C5.1@3267.72,523.39
  Top Layer w78.74: v2(2598.43,1417.32) 2598.43,1390.15 2609.85,1378.73 3265.56,1378.73 ; v2(2598.43,2362.2) 2598.43,2335.03 2609.85,2323.61 3240,2323.61 ; v2(2600.58,474.6) 2600.58,447.42 2612,436 3267.72,436
  Top Layer w125.98: J1.1 814.96,483.04 1043.02,254.98 2375.79,254.98 2480.32,359.51 2480.32,468.5 2484.25,472.44 v2@2598.42,472.44 ; C6.2@2480.32,1413.39 2484.25,1417.32 v2(2598.43,1417.32) ; C6.2@2480.32,2358.27 2484.25,2362.2 v2(2598.43,2362.2)
  Bottom Layer w31.5: 511.02,1850.39 511.02,1851.18 ; P5.2 511.02,1851.18 ; v2@637.22,711.19 637.22,1724.98 ; U1.1 699.39,1662.82 637.22,1724.98 ; 511.02,1851.18 637.22,1724.98
  Bottom Layer w125.98: v2(2592.2,1148.98) 2598.43,1155.21 v2(2598.43,1417.32) 2600.58,1419.48 2600.58,1908.3 v2(2600.58,2087.43) 2600.58,2360.05 v2(2598.43,2362.2) 2600.58,2364.36 v2(2600.58,2858.74) 2600.58,3032.42 v2(2599,3034) ; v2(2600.58,474.6) v2(2600.58,968.98) ; v2(2600.58,968.98) v2@2600.58,1145.42
  other v2: 634.69,713.72
XDIR: PICO1.6 Q1.20@2322.83,1092.52 | length 817.5
  Top Layer w10: v1(2231,1149) 2282.8,1097.2 2292.07,1097.2 2296.75,1092.52 Q1.20@2322.83,1092.52
  Bottom Layer w10: PICO1.6@1989.76,893.7 1989.76,909.94 2006.59,926.76 2006.59,927.59 2113.27,1034.27 2204.39,1034.27 2226.53,1012.14 2226.53,943.1 2244.1,925.53 2268.95,925.53 2303,959.57 2303,1080.29 2234.29,1149 v1(2231,1149)
XFAULT: PICO1.7 Q1.18@2322.83,1143.7 R2.2@2165.36,1181.1 | length 676.8
  Top Layer w10: R2.2@2165.36,1181.1 2165.36,1182 2246,1182 ; v1(2226.34,1236) 2226.34,1205.24 2246,1185.58 2246,1182 ; Q1.18@2322.83,1143.7 2284.01,1143.7 2246,1181.71 2246,1182
  Bottom Layer w10: PICO1.7@1889.76,993.7 1989.76,993.7 1989.76,996.56 2226.34,1233.14 v1(2226.34,1236)
XHOME: PICO1.4 Q1.27@2322.83,913.39 R1.1@2204.72,1062.99 | length 803.3
  Top Layer w10: PICO1.4@1877.3,693.7 PICO1.4@1889.76,693.7 ; v1(2129,995) 2153.45,1019.45 2166.1,1019.45 2204.72,1058.07 R1.1@2204.72,1062.99 ; v1(2273,831) 2276.34,834.34 2276.34,896.45 2292.92,913.04 2322.49,913.04 Q1.27@2322.83,913.39
  Bottom Layer w10: PICO1.4@1989.76,693.7 2127.06,831 v1(2273,831) 2269.17,834.83 2269.17,843.83 2132.83,980.17 2132.83,991.17 v1(2129,995)
XSTEP: PICO1.5 Q1.22@2322.83,1041.34 | length 499.5
  Top Layer w10: PICO1.5@1989.76,793.7 2058.7,793.7 2115,850 2175,850 2203,878 2203,987 2253.16,1037.16 2257.34,1041.34 Q1.22@2322.83,1041.34
YDIR: PICO1.11 Q1.20@2322.83,2037.4 | length 1014.7
  Top Layer w10: v1(2264,2017) 2266.32,2017 2286.37,2037.05 2322.49,2037.05 Q1.20@2322.83,2037.4
  Bottom Layer w10: PICO1.11@1989.76,1393.7 2196.7,1393.7 2267,1464 2267,1557 2183,1641 2183,1714 2287.81,1818.81 2287.81,1989.7 2264,2013.5 v1(2264,2017)
YFAULT: PICO1.12 Q1.18@2322.83,2088.58 R2.2@2165.35,2086.61 | length 1302.8
  Top Layer w10: v1(2153,1988) 2153,1993.41 2167,2007.41 R2.2@2167,2084.97 ; R2.2@2165.35,2086.61 R2.2@2167,2084.97 ; Q1.18@2322.83,2088.58 2296.75,2088.58 2292.07,2083.9 2288.58,2083.9 2272.69,2068 2183.97,2068 R2.2@2167,2084.97
  Bottom Layer w10: PICO1.12@1889.76,1493.7 1917.7,1493.7 1989.76,1493.7 2003.39,1493.7 2083.39,1413.7 2188.42,1413.7 2247,1472.28 2247,1546 2150.14,1642.86 2150.14,1742.09 2219,1810.95 2219,1887.72 2153,1953.72 v1(2153,1988)
YHOME: PICO1.9 Q1.27@2322.83,1858.27 R1.1@2181.37,1929 | length 1391.4
  Top Layer w10: PICO1.9@1989.76,1193.7 2051.7,1255.64 2051.7,1483.7 2121.25,1553.25 2142.32,1553.25 2161.27,1572.2 2161.27,1576.73 v1(2165.21,1572.79) ; v1@2158.73,1576.73 2158.73,1579.27 2161.68,1582.21 2178.21,1582.21 2276,1680 2276,1844.27 2290,1858.27 Q1.27@2322.83,1858.27 ; v1(2176.65,1875.87) 2176.65,1924.27 R1.1@2181.37,1929
  Bottom Layer w10: PICO1.9@1859.3,1193.7 1889.76,1193.7 1979.76,1193.7 PICO1.9@1989.76,1193.7 ; v1(2165.21,1572.79) 2130.14,1607.86 2130.14,1750.38 2199,1819.24 2199,1853.51 v1(2176.65,1875.87)
YSTEP: PICO1.10 Q1.22@2322.83,1986.22 | length 1449.5
  Top Layer w10: v1(2202,2035) 2205,2032 2205,2005 2223.44,1986.56 2322.49,1986.56 Q1.22@2322.83,1986.22
  Bottom Layer w10: PICO1.10@1989.76,1293.7 2138.7,1293.7 2313,1468 2313,1552 2206,1659 2206,1706 2238.25,1738.25 2334.14,1738.25 2340,1744.11 2340,2042 2314,2068 2226.86,2068 2219.79,2060.93 2219.79,2058.2 2202,2040.41 v1(2202,2035)
ZDIR: PICO1.16 Q1.20@2322.83,2982.28 | length 1370.2
  Top Layer w10: v1(2124,2973) 2126.68,2973 2146.55,2992.87 2200.11,2992.87 2220.7,3013.46 2248.96,3013.46 2280.14,2982.28 Q1.20@2322.83,2982.28
  Bottom Layer w10: PICO1.16@1989.76,1893.7 2075,1978.94 2075,2459.43 2097.24,2481.67 2097.24,2718.01 2089,2726.25 2089,2938 v1(2124,2973)
ZFAULT: PICO1.17 Q1.18@2322.83,3033.46 R2.2@2165.35,3031.5 | length 1319.4
  Top Layer w10: v1(2077,2976) 2074,2979 2074,3011 2094.5,3031.5 2165.35,3031.5 2167.32,3033.46 Q1.18@2322.83,3033.46
  Bottom Layer w10: PICO1.17@1989.76,1993.7 2050,2053.94 2050,2825.65 2042,2833.65 2042,2938.57 2077,2973.57 v1(2077,2976)
ZHOME: PICO1.14 Q1.27@2322.83,2803.15 R1.1@2206.37,2848 | length 2123.2
  Top Layer w10: PICO1.14@1889.76,1693.7 1759.3,1693.7 1720,1733 1720,2580.78 1781.19,2641.97 1919.6,2641.97 1935.57,2626 2293.43,2626 2328,2660.57 v1(2328,2707) 2328,2712.41 2321.29,2719.13 2321.29,2722.71 2273,2771 2273,2790 2286.15,2803.15 Q1.27@2322.83,2803.15 ; v1(2206.37,2772.05) R1.1@2206.37,2848
  Bottom Layer w10: v1@2204.72,2774 2262,2774 2328,2708 v1(2328,2707)
ZSTEP: PICO1.15 Q1.22@2322.83,2931.1 | length 1430.8
  Top Layer w8: v2(2251,2969) 2256.78,2969 2291.34,2934.45 Q1.22@2293.01,2932.77
  Bottom Layer w10: PICO1.15@1989.76,1793.7 2110,1913.94 2110,1936 2110,2144 2110,2183 2166,2239 2166,2303 2275,2412 2275,2464 2166,2573 2166,2799 2232,2865 2232,2945.57 2251,2964.57 v2(2251,2969)
pads on no net: PICO1.31 PICO1.32 PICO1.34 PICO1.35 PICO1.37 PICO1.41 PICO1.42 PICO1.43 Q1.19 Q1.23 SW1.1 SW1.3 SW2.1 SW2.3 SW3.1 SW3.3 SW4.1 SW4.3 SW_RESET.1 SW_RESET.3

## Polygon pours and split planes (outlines as drawn)
GND on Bottom Layer "GND_L02_P001" (solid, pour order 1): 157.48,3385.83 3385.83,3385.83 3385.83,157.48 157.48,157.48
GND on Top Layer "GND_L01_P000" (solid, pour order 0): 157.48,3385.83 3385.83,3385.83 3385.83,157.48 157.48,157.48

## Keep-outs
Keep-Out Layer:
  the board outline again, w47.24

## Silkscreen, mask and mechanical layers (free items; w line width, h text height)
Top Overlay:
  text "CC2511" at 275.59,3149.61 h157.48
  text "VDIV" at 1835.75,3034.14 h15.75
  text "CNS Group1" at 265.75,2982.27 h118.11
  text "ZMotor" at 3326.77,2736.22 h59.06 r90
  text "GND" at 1786.03,2664.88 h15.75
  text "V3P3" at 1885.57,2663.13 h15.75
  text "YMotor" at 3326.77,1791.34 h59.06 r90
  text "XMotor" at 3326.77,846.46 h59.06 r90
  text "GND" at 2228.94,714.94 h15
  text "VSYS" at 2230.94,618.94 h15
  text "GPIO1" at 2230.94,515.94 h15
  text "GPIO0" at 2231.94,407.94 h15
  text "Debug" at 2116.94,239.5 h19.68